# EAGLE board gatewayNodeV2 (EAGLE 7.2.0)
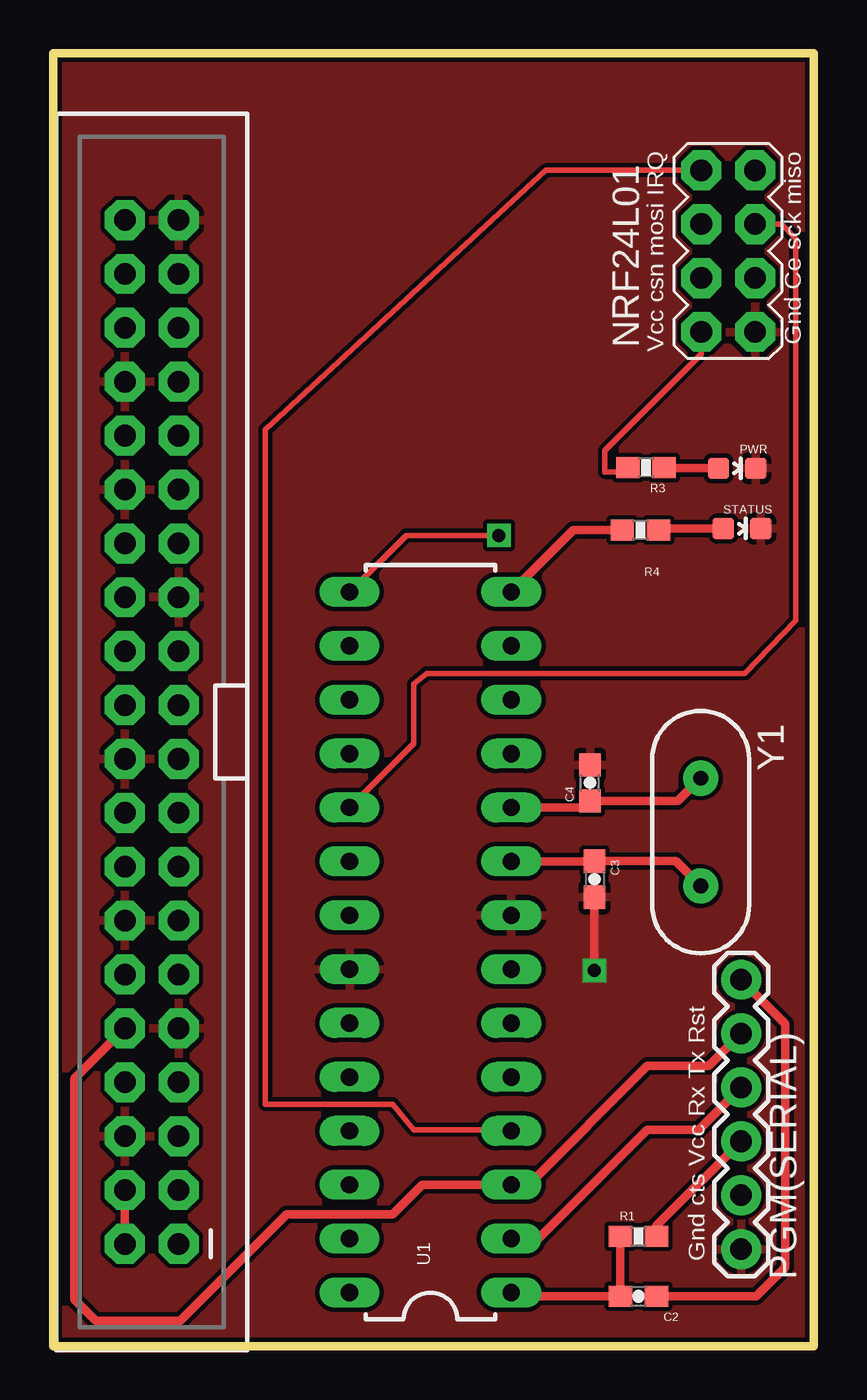
[diagram p0: board, top side]
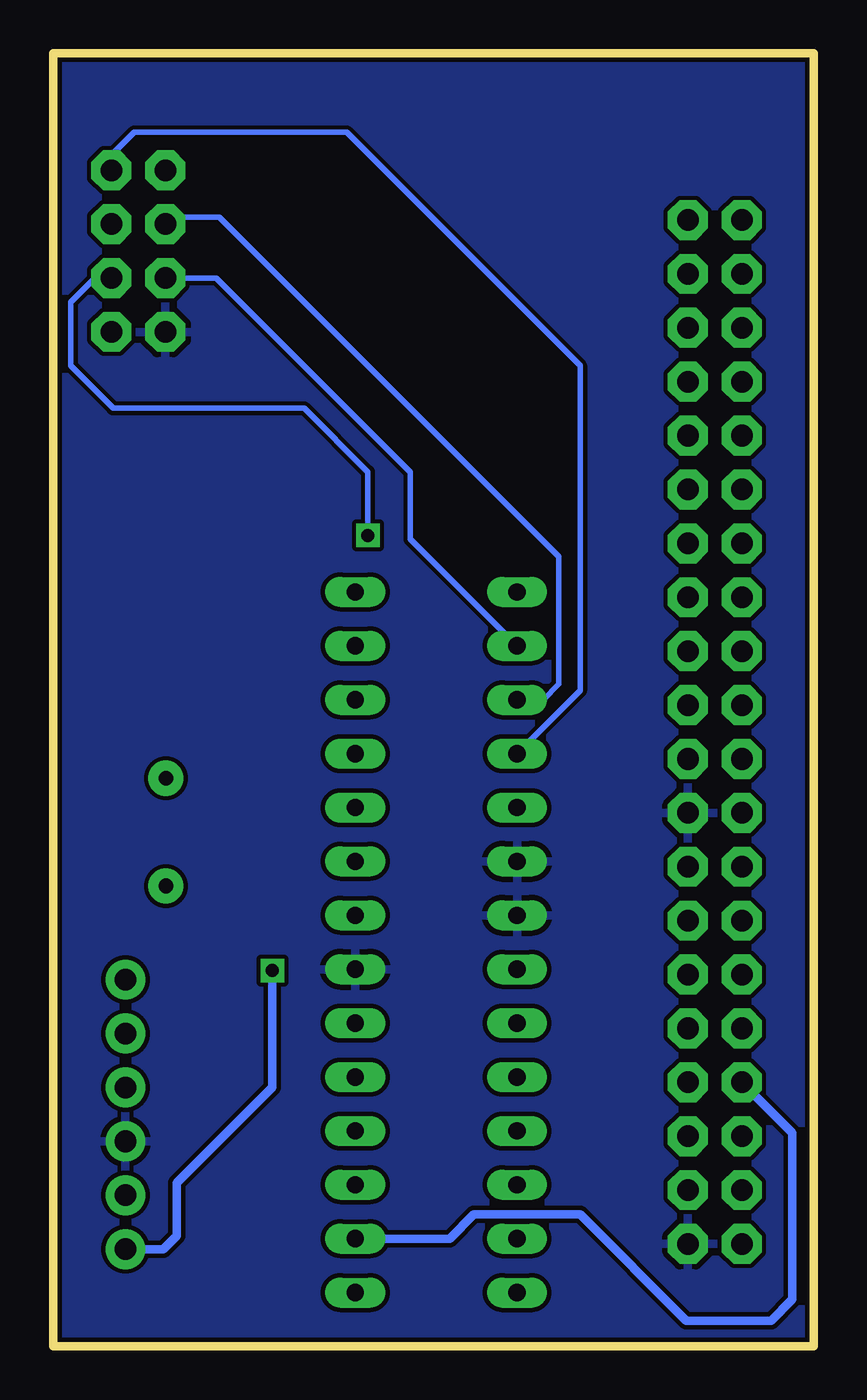
[diagram p1: board, bottom side, seen from below]

Size 35.83 x 60.96 mm. Coordinates in mm from the lower left corner, seen from the top.
Outline: 0,60.96 0,0 35.83,0 35.83,60.96 0,60.96
Copper layers (1*16): Top 0.035mm / dielectric 1.5mm / Bottom 0.035mm
Design rules "SparkFun": minimum track width 8mil, minimum drill 20mil, track to track 8mil, track to pad 8mil, pad to pad 8mil, via to via 8mil, smd to smd 8mil, copper to edge 8mil, drill to drill 8mil, minimum pad ring 12mil, minimum via ring 10mil, stop-mask expansion 4mil, vias tented up to drill 20mil, thermal gap 10mil

## Footprints (pad centres in the part's own frame; a part is rotated, then mirrored left to right if it is on the bottom)
0603-CAP = smd 1.1 x 1: 1 -0.85,0; 2 0.85,0
2X20-SHROUDED = drill 1.016 pad 1.88 octagon: 1 -1.27,24.13; 2 1.27,24.13; 3 -1.27,21.59; 4 1.27,21.59; 5 -1.27,19.05; 6 1.27,19.05; 7 -1.27,16.51; 8 1.27,16.51; 9 -1.27,13.97; 10 1.27,13.97; 11 -1.27,11.43; 12 1.27,11.43; 13 -1.27,8.89; 14 1.27,8.89; 15 -1.27,6.35; 16 1.27,6.35; 17 -1.27,3.81; 18 1.27,3.81; 19 -1.27,1.27; 20 1.27,1.27; 21 -1.27,-1.27; 22 1.27,-1.27; 23 -1.27,-3.81; 24 1.27,-3.81; 25 -1.27,-6.35; 26 1.27,-6.35; 27 -1.27,-8.89; 28 1.27,-8.89; 29 -1.27,-11.43; 30 1.27,-11.43; 31 -1.27,-13.97; 32 1.27,-13.97; 33 -1.27,-16.51; 34 1.27,-16.51; 35 -1.27,-19.05; 36 1.27,-19.05; 37 -1.27,-21.59; 38 1.27,-21.59; 39 -1.27,-24.13; 40 1.27,-24.13
2X4 = drill 1.016 pad 1.88 octagon: 1 -3.81,-1.27; 2 -3.81,1.27; 3 -1.27,-1.27; 4 -1.27,1.27; 5 1.27,-1.27; 6 1.27,1.27; 7 3.81,-1.27; 8 3.81,1.27
1X06 = drill 1.016 pad 1.88: 1 0,0; 2 2.54,0; 3 5.08,0; 4 7.62,0; 5 10.16,0; 6 12.7,0
LED-0603 = smd 1 x 1: A 0,-0.877; C 0,0.877
0603-RES = smd 1.1 x 1: 1 -0.85,0; 2 0.85,0
DIL28-3 = drill 0.813 long: 1 -16.51,-3.81; 2 -13.97,-3.81; 3 -11.43,-3.81; 4 -8.89,-3.81; 5 -6.35,-3.81; 6 -3.81,-3.81; 7 -1.27,-3.81; 8 1.27,-3.81; 9 3.81,-3.81; 10 6.35,-3.81; 11 8.89,-3.81; 12 11.43,-3.81; 13 13.97,-3.81; 14 16.51,-3.81; 15 16.51,3.81; 16 13.97,3.81; 17 11.43,3.81; 18 8.89,3.81; 19 6.35,3.81; 20 3.81,3.81; 21 1.27,3.81; 22 -1.27,3.81; 23 -3.81,3.81; 24 -6.35,3.81; 25 -8.89,3.81; 26 -11.43,3.81; 27 -13.97,3.81; 28 -16.51,3.81
HC49US = drill 0.7 pad 1.651: 1 -2.54,0; 2 2.54,0

## Placement (x,y rotation side)
C2  0.1uF  [0603-CAP]  27.58,2.36 180 top
C3  22pF  [0603-CAP]  25.51,22.02 270 top
C4  22pF  [0603-CAP]  25.3,26.56 90 top
JP1  RASPBERRYPI-B+-GPIO  [2X20-SHROUDED]  4.65,28.96 180 top
NRF24L01  M04X2  [2X4]  31.81,51.63 90 top
PGM(SERIAL)  [1X06]  32.42,17.29 270 top
PWR  [LED-0603]  32.23,41.39 270 top
R1  1K  [0603-RES]  27.58,5.19 0 top
R3  220  [0603-RES]  27.94,41.42 180 top
R4  220  [0603-RES]  27.67,38.48 180 top
STATUS  [LED-0603]  32.46,38.55 270 top
U1  ATMEGA328P_PDIP  [DIL28-3]  17.78,19.05 90 top
Y1  [HC49US]  30.51,24.24 270 top

## Library data of the parts
C2 = SparkFun-Capacitors; PROD_ID: CAP-00810
C3 C4 = SparkFun-Capacitors; PROD_ID: CAP-07876
JP1 = SparkFun-Boards
NRF24L01 PGM(SERIAL) = SparkFun-Connectors
PWR STATUS = SparkFun-LED
R1 R3 R4 = SparkFun-Resistors; PROD_ID: RES-07856
U1 = SparkFun-DigitalIC
Y1 = SparkFun-FreqCtrl

## Nets
5V: JP1.2 JP1.4
BACK: U1.13
CE: NRF24L01.3 U1.15
CSN: NRF24L01.4 U1.16
DOWN: U1.12
DTHP: U1.26
DTR: C2.1 PGM(SERIAL).1
GND: C3.2 C4.2 JP1.6 JP1.9 JP1.14 JP1.20 JP1.25 JP1.30 JP1.34 JP1.39 NRF24L01.1 PGM(SERIAL).6 PWR.C STATUS.C U1.8 U1.22
IRQ: NRF24L01.8 U1.4
LED1: R4.2 U1.14
MISO: NRF24L01.7 U1.18
MOSI: NRF24L01.6 U1.17
N$1: C3.1 U1.9 Y1.2
N$2: C4.1 U1.10 Y1.1
N$4: PWR.A R3.1
N$5: R4.1 STATUS.A
PC2: U1.25
RESET: C2.2 R1.1 U1.1
RX: JP1.8 PGM(SERIAL).3 U1.2
RX_K30: U1.5
SCK: NRF24L01.5 U1.19
SCL: U1.28
SDA: U1.27
TX: JP1.10 PGM(SERIAL).2 U1.3
TX_K30: U1.6
UP: U1.11
VCC: JP1.1 JP1.17 NRF24L01.2 PGM(SERIAL).4 R1.2 R3.2 U1.7 U1.20 U1.21

## Tracks (layer width: path | path; a pad name or v marks a point on that pad's centre or on a via)
5V
  Top 0.406: JP1.2 JP1.4
CE  (via drill 0.6)
  Top 0.254: v21,38.22 16.63,38.22 U1.15
  Bottom 0.254: NRF24L01.3 33.86,50.36 35,49.22 35,46.22 33,44.22 24,44.22 21,41.22 v21,38.22
CSN
  Bottom 0.254: NRF24L01.4 28.14,50.36 19,41.22 19,38.05 U1.16
DTR
  Top 0.406: C2.1 33.14,2.36 34.5,3.72 34.5,15.21 PGM(SERIAL).1
GND  (via drill 0.6)
  Top 0.406: v25.5,17.72 C3.2
  Bottom 0.406: PGM(SERIAL).6 30.63,4.59 30,5.22 30,7.72 25.5,12.22 v25.5,17.72
  pour Top: 0,60.96 0,0 35.83,0 35.83,60.96
IRQ
  Top 0.254: NRF24L01.8 23.22,55.44 10,43.22 10,11.42 16,11.42 17,10.22 21.53,10.22 U1.4
LED1
  Top 0.406: R4.2 24.51,38.48 U1.14
MISO
  Bottom 0.254: NRF24L01.7 33.08,56.14 32,57.22 22,57.22 11,46.22 11,30.91 U1.18
MOSI
  Bottom 0.254: U1.17 12.74,30.48 12,31.22 12,37.22 28,53.22 30.22,53.22 NRF24L01.6
N$1
  Top 0.406: U1.9 25.5,22.86 C3.1 29.34,22.88 Y1.2
N$2
  Top 0.406: U1.10 24.99,25.4 C4.1 29.44,25.71 Y1.1
N$4
  Top 0.406: PWR.A 28.82,41.39 R3.1
N$5
  Top 0.406: STATUS.A 28.59,38.55 R4.1
RESET
  Top 0.406: U1.1 21.77,2.36 C2.2 R1.1
RX
  Top 0.406: U1.2 22.86,5.08 28,10.22 30.43,10.22 PGM(SERIAL).3
  Bottom 0.406: U1.2 17.14,5.08 16,6.22 11,6.22 6,1.22 2,1.22 1,2.22 1,10.07 JP1.8
SCK
  Top 0.254: NRF24L01.5 34.32,52.9 35,52.22 35,34.22 32.6,31.72 17.6,31.72 17,31.22 17,28.43 U1.19
TX
  Top 0.406: PGM(SERIAL).2 30.89,13.22 28,13.22 22.4,7.62 U1.3 17.4,7.62 16,6.22 11,6.22 6,1.22 2,1.22 1,2.22 1,12.61 JP1.10
VCC
  Top 0.254: NRF24L01.2 30.54,46.76 26,42.22 26,41.22 26.89,41.22 R3.2
  Top 0.406: R1.2 28.43,5.68 PGM(SERIAL).4
  pour Bottom: 0,60.96 35.83,60.96 35.83,0 0,0

## Text on the board
tNames: Vcc csn mosi IRQ | Gnd Ce sck miso | Gnd cts Vcc Rx Tx Rst